# EAGLE board Qwiic Pressure Sensor - LPS25HB-Panel (EAGLE 9.0.1), part 1 of 2
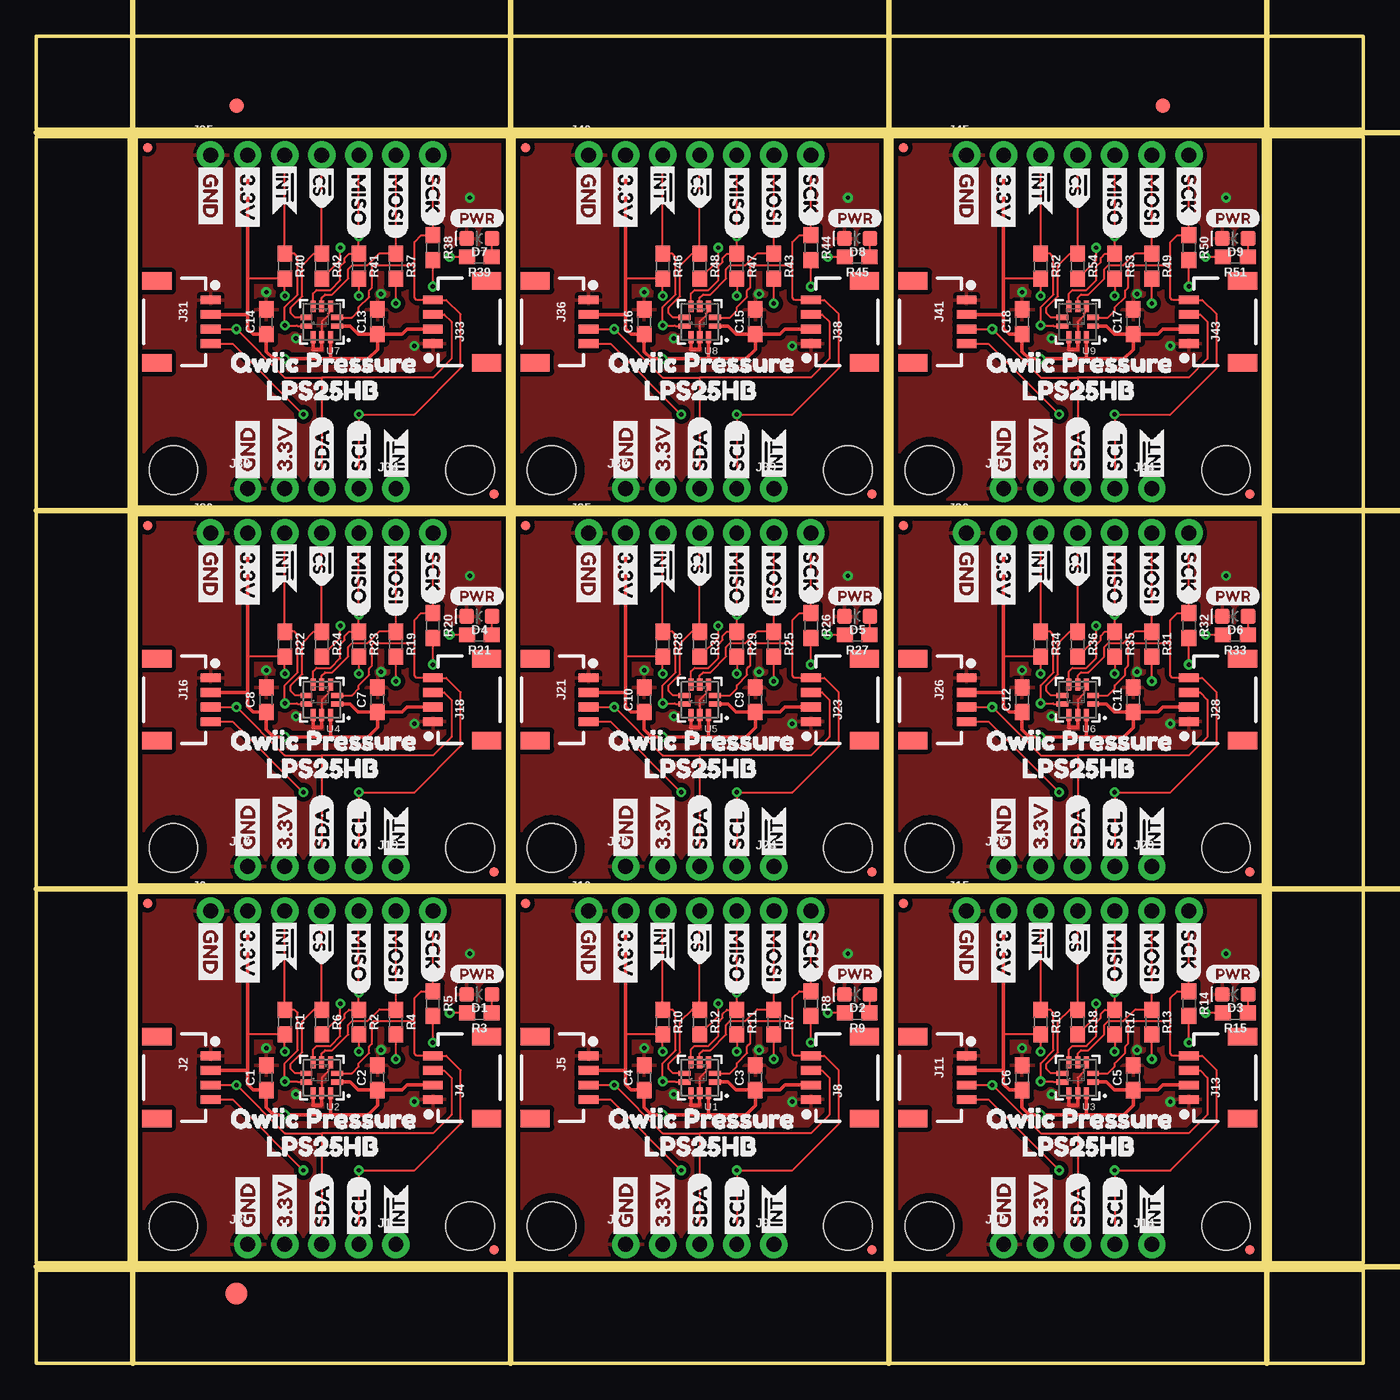
[diagram p0: board, top side]
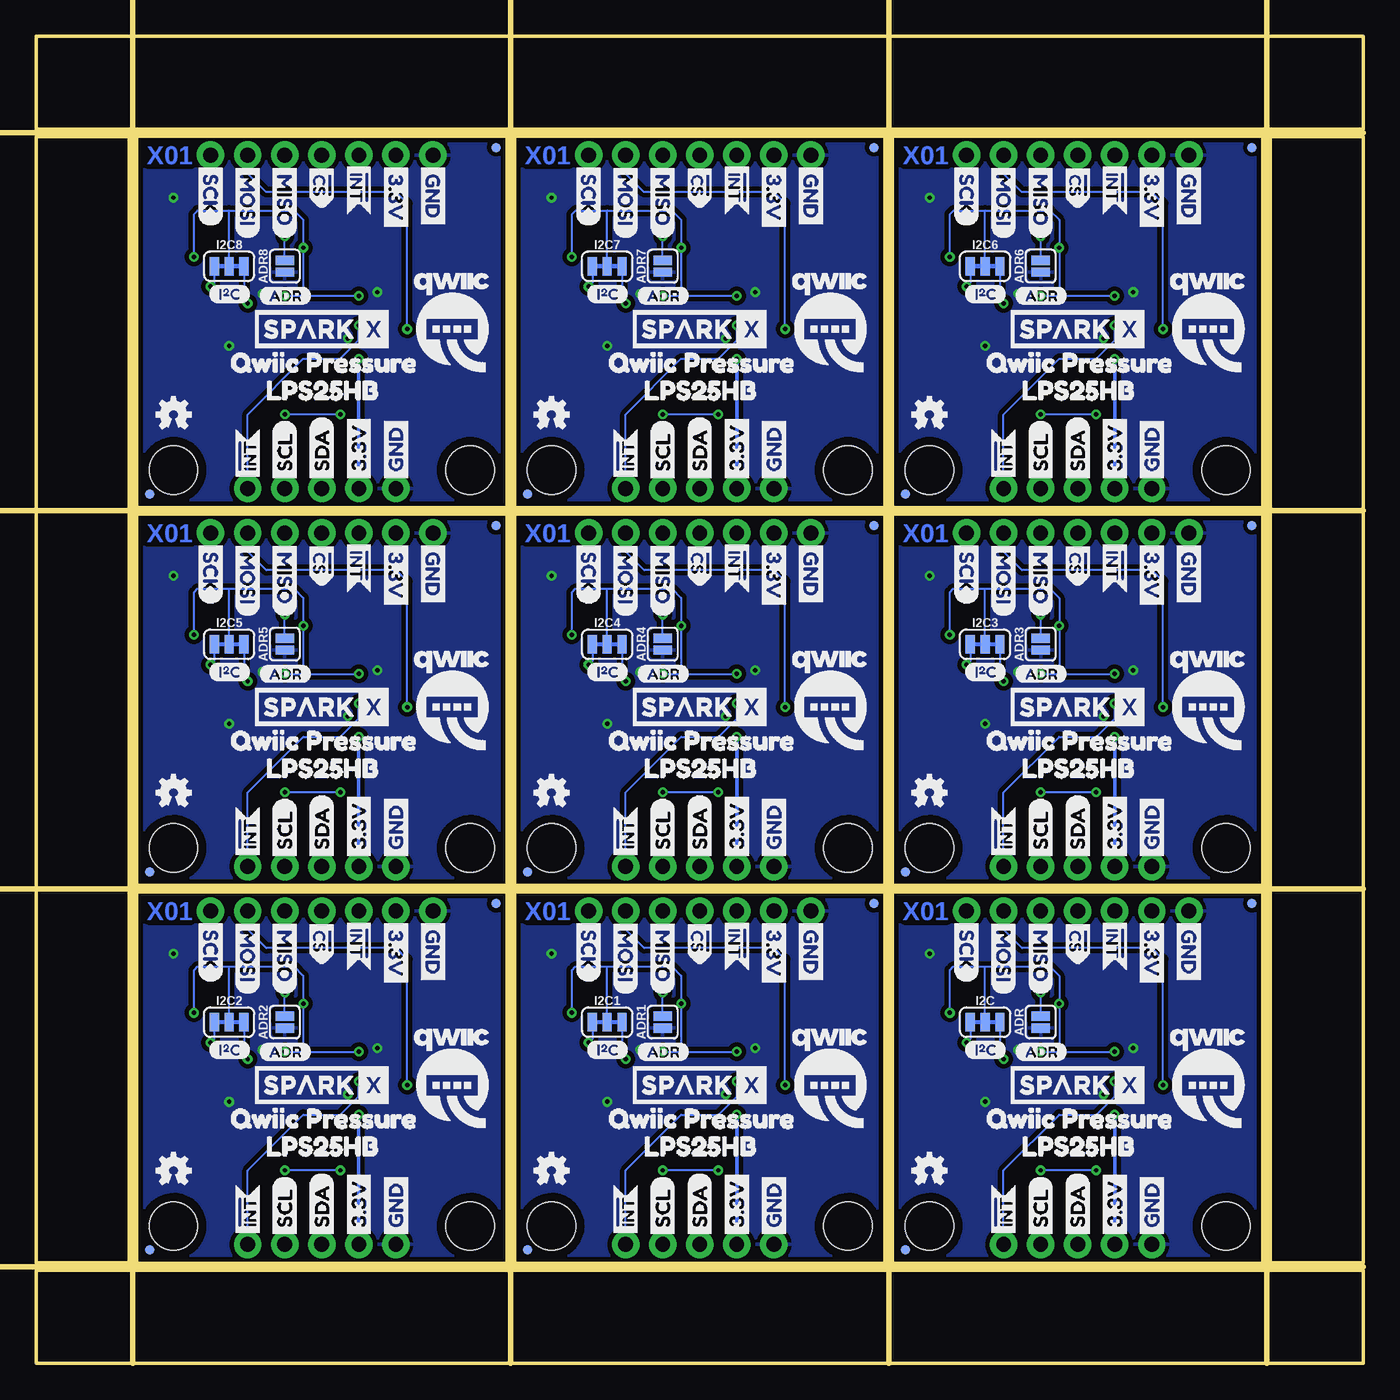
[diagram p1: board, bottom side, seen from below]

Size 90.93 x 90.93 mm. Coordinates in mm from the lower left corner, seen from the top.
Outline: 6.86,6.86 6.86,32.26 32.26,32.26 32.26,6.86 6.86,6.86
Outline: 32.77,6.86 32.77,32.26 58.17,32.26 58.17,6.86 32.77,6.86
Outline: 58.67,6.86 58.67,32.26 84.07,32.26 84.07,6.86 58.67,6.86
Outline: 6.86,32.77 6.86,58.17 32.26,58.17 32.26,32.77 6.86,32.77
Outline: 32.77,32.77 32.77,58.17 58.17,58.17 58.17,32.77 32.77,32.77
Outline: 58.67,32.77 58.67,58.17 84.07,58.17 84.07,32.77 58.67,32.77
Outline: 6.86,58.67 6.86,84.07 32.26,84.07 32.26,58.67 6.86,58.67
Outline: 32.77,58.67 32.77,84.07 58.17,84.07 58.17,58.67 32.77,58.67
Outline: 58.67,58.67 58.67,84.07 84.07,84.07 84.07,58.67 58.67,58.67
Outline: 0,6.35 90.93,6.35 90.93,0 0,0 0,6.35
Outline: 84.58,84.07 90.93,84.07 90.93,6.86 84.58,6.86 84.58,84.07
Outline: 0,90.93 90.93,90.93 90.93,84.58 0,84.58 0,90.93
Outline: 0,84.07 6.35,84.07 6.35,6.86 0,6.86 0,84.07
Copper layers (1*16): Top 0.035mm / dielectric 1.5mm / Bottom 0.035mm
Design rules "SparkFun-2-layer-PCBWay-LIMIT": minimum track width 6mil, minimum drill 0.3mm, track to track 6mil, track to pad 6mil, pad to pad 6mil, via to via 6mil, smd to smd 6mil, copper to edge 6mil, drill to drill 6mil, minimum pad ring 7mil, minimum via ring 7mil, stop-mask expansion 4mil, vias tented up to drill 25mil, thermal gap 10mil
tRestrict: area 19.2,18.2 to 19.3,18.8; area 18.5,18.2 to 18.7,18.8; area 20.4,20.3 to 20.6,21; area 45.1,18.2 to 45.2,18.8; area 44.4,18.2 to 44.6,18.8; area 46.4,20.3 to 46.5,21; area 71,18.2 to 71.1,18.8; area 70.4,18.2 to 70.5,18.8; area 72.3,20.3 to 72.4,21; area 19.2,44.1 to 19.3,44.7; area 18.5,44.1 to 18.7,44.7; area 20.4,46.2 to 20.6,46.9; area 45.1,44.1 to 45.2,44.7; area 44.4,44.1 to 44.6,44.7; area 46.4,46.2 to 46.5,46.9; area 71,44.1 to 71.1,44.7; area 70.4,44.1 to 70.5,44.7; area 72.3,46.2 to 72.4,46.9; area 19.2,70 to 19.3,70.6; area 18.5,70 to 18.7,70.6; area 20.4,72.1 to 20.6,72.8; area 45.1,70 to 45.2,70.6; area 44.4,70 to 44.6,70.6; area 46.4,72.1 to 46.5,72.8; area 71,70 to 71.1,70.6; area 70.4,70 to 70.5,70.6; area 72.3,72.1 to 72.4,72.8
Milling: 8 lines

## Footprints (pad centres in the part's own frame; a part is rotated, then mirrored left to right if it is on the bottom)
SMT-JUMPER_2_NO_SILK = smd 0.635 x 1.27: 1 -0.406,0; 2 0.406,0
0603 = smd 1.1 x 1: 1 -0.85,0; 2 0.85,0
LED-0603 = smd 1 x 1: A -0.877,0; C 0.877,0
FIDUCIAL-1X2 = smd 1 x 1: 1 0,0
FIDUCIAL-1.5X3 = smd 1.5 x 1.5: 1 0,0
SMT-JUMPER_3_2-NC_TRACE_SILK = smd 0.635 x 1.27: 1 -1.016,0; 2 0,0; 3 1.016,0
1X01_NO_SILK = drill 1.016 pad 1.88: 1 0,0
1X04_1MM_RA = smd 0.6 x 1.35: 1 -1.5,0; 2 -0.5,0; 3 0.5,0; 4 1.5,0 | smd 1.2 x 2: NC1 2.8,-3.675; NC2 -2.8,-3.675
1X04_NO_SILK = drill 1.016 pad 1.88: 1 0,0; 2 2.54,0; 3 5.08,0; 4 7.62,0
1X07_NO_SILK = drill 1.016 pad 1.88: 1 0,0; 2 2.54,0; 3 5.08,0; 4 7.62,0; 5 10.16,0; 6 12.7,0; 7 15.24,0
MICRO-FIDUCIAL = smd 0.635 x 0.635: 1 0,0
STAND-OFF = hole 3.302: 0,0
LPS25HB = smd 0.8 x 0.35: 1 -1.05,0.3; 2 -1.05,-0.3; 6 1.05,-0.3; 7 1.05,0.3 | smd 0.35 x 0.8: 3 -0.6,-1.05; 4 0,-1.05; 5 0.6,-1.05; 8 0.6,1.05; 9 0,1.05; 10 -0.6,1.05

## Placement (x,y rotation side)
ADR  [SMT-JUMPER_2_NO_SILK]  22.1,23.37 90 bottom
ADR1  [SMT-JUMPER_2_NO_SILK]  48.01,23.37 90 bottom
ADR2  [SMT-JUMPER_2_NO_SILK]  73.91,23.37 90 bottom
ADR3  [SMT-JUMPER_2_NO_SILK]  22.1,49.28 90 bottom
ADR4  [SMT-JUMPER_2_NO_SILK]  48.01,49.28 90 bottom
ADR5  [SMT-JUMPER_2_NO_SILK]  73.91,49.28 90 bottom
ADR6  [SMT-JUMPER_2_NO_SILK]  22.1,75.18 90 bottom
ADR7  [SMT-JUMPER_2_NO_SILK]  48.01,75.18 90 bottom
ADR8  [SMT-JUMPER_2_NO_SILK]  73.91,75.18 90 bottom
C1  4.7uF  [0603]  15.75,19.56 90 top
C2  0.1uF  [0603]  23.37,19.56 90 top
C3  0.1uF  [0603]  49.28,19.56 90 top
C4  4.7uF  [0603]  41.66,19.56 90 top
C5  0.1uF  [0603]  75.18,19.56 90 top
C6  4.7uF  [0603]  67.56,19.56 90 top
C7  0.1uF  [0603]  23.37,45.47 90 top
C8  4.7uF  [0603]  15.75,45.47 90 top
C9  0.1uF  [0603]  49.28,45.47 90 top
C10  4.7uF  [0603]  41.66,45.47 90 top
C11  0.1uF  [0603]  75.18,45.47 90 top
C12  4.7uF  [0603]  67.56,45.47 90 top
C13  0.1uF  [0603]  23.37,71.37 90 top
C14  4.7uF  [0603]  15.75,71.37 90 top
C15  0.1uF  [0603]  49.28,71.37 90 top
C16  4.7uF  [0603]  41.66,71.37 90 top
C17  0.1uF  [0603]  75.18,71.37 90 top
C18  4.7uF  [0603]  67.56,71.37 90 top
D1  RED  [LED-0603]  30.35,25.27 180 top
D2  RED  [LED-0603]  56.26,25.27 180 top
D3  RED  [LED-0603]  82.17,25.27 180 top
D4  RED  [LED-0603]  30.35,51.18 180 top
D5  RED  [LED-0603]  56.26,51.18 180 top
D6  RED  [LED-0603]  82.17,51.18 180 top
D7  RED  [LED-0603]  30.35,77.09 180 top
D8  RED  [LED-0603]  56.26,77.09 180 top
D9  RED  [LED-0603]  82.17,77.09 180 top
E$1  [FIDUCIAL-1X2]  13.72,86.17 0 top
E$2  [FIDUCIAL-1X2]  77.22,86.17 0 top
E$3  [FIDUCIAL-1.5X3]  13.72,4.76 0 top
I2C  [SMT-JUMPER_3_2-NC_TRACE_SILK]  25.91,23.37 0 bottom
I2C1  [SMT-JUMPER_3_2-NC_TRACE_SILK]  51.82,23.37 0 bottom
I2C2  [SMT-JUMPER_3_2-NC_TRACE_SILK]  77.72,23.37 0 bottom
I2C3  [SMT-JUMPER_3_2-NC_TRACE_SILK]  25.91,49.28 0 bottom
I2C4  [SMT-JUMPER_3_2-NC_TRACE_SILK]  51.82,49.28 0 bottom
I2C5  [SMT-JUMPER_3_2-NC_TRACE_SILK]  77.72,49.28 0 bottom
I2C6  [SMT-JUMPER_3_2-NC_TRACE_SILK]  25.91,75.18 0 bottom
I2C7  [SMT-JUMPER_3_2-NC_TRACE_SILK]  51.82,75.18 0 bottom
I2C8  [SMT-JUMPER_3_2-NC_TRACE_SILK]  77.72,75.18 0 bottom
J1  [1X01_NO_SILK]  24.64,8.13 0 top
J2  [1X04_1MM_RA]  11.94,19.56 270 top
J3  PTH  [1X04_NO_SILK]  14.48,8.13 0 top
J4  [1X04_1MM_RA]  27.18,19.56 90 top
J5  [1X04_1MM_RA]  37.85,19.56 270 top
J6  [1X07_NO_SILK]  11.94,30.99 0 top
J7  PTH  [1X04_NO_SILK]  40.39,8.13 0 top
J8  [1X04_1MM_RA]  53.09,19.56 90 top
J9  [1X01_NO_SILK]  50.55,8.13 0 top
J10  [1X07_NO_SILK]  37.85,30.99 0 top
J11  [1X04_1MM_RA]  63.75,19.56 270 top
J12  PTH  [1X04_NO_SILK]  66.29,8.13 0 top
J13  [1X04_1MM_RA]  78.99,19.56 90 top
J14  [1X01_NO_SILK]  76.45,8.13 0 top
J15  [1X07_NO_SILK]  63.75,30.99 0 top
J16  [1X04_1MM_RA]  11.94,45.47 270 top
J17  PTH  [1X04_NO_SILK]  14.48,34.04 0 top
J18  [1X04_1MM_RA]  27.18,45.47 90 top
J19  [1X01_NO_SILK]  24.64,34.04 0 top
J20  [1X07_NO_SILK]  11.94,56.9 0 top
J21  [1X04_1MM_RA]  37.85,45.47 270 top
J22  PTH  [1X04_NO_SILK]  40.39,34.04 0 top
J23  [1X04_1MM_RA]  53.09,45.47 90 top
J24  [1X01_NO_SILK]  50.55,34.04 0 top
J25  [1X07_NO_SILK]  37.85,56.9 0 top
J26  [1X04_1MM_RA]  63.75,45.47 270 top
J27  PTH  [1X04_NO_SILK]  66.29,34.04 0 top
J28  [1X04_1MM_RA]  78.99,45.47 90 top
J29  [1X01_NO_SILK]  76.45,34.04 0 top
J30  [1X07_NO_SILK]  63.75,56.9 0 top
J31  [1X04_1MM_RA]  11.94,71.37 270 top
J32  PTH  [1X04_NO_SILK]  14.48,59.94 0 top
J33  [1X04_1MM_RA]  27.18,71.37 90 top
J34  [1X01_NO_SILK]  24.64,59.94 0 top
J35  [1X07_NO_SILK]  11.94,82.8 0 top
J36  [1X04_1MM_RA]  37.85,71.37 270 top
J37  PTH  [1X04_NO_SILK]  40.39,59.94 0 top
J38  [1X04_1MM_RA]  53.09,71.37 90 top
J39  [1X01_NO_SILK]  50.55,59.94 0 top
J40  [1X07_NO_SILK]  37.85,82.8 0 top
J41  [1X04_1MM_RA]  63.75,71.37 270 top
J42  PTH  [1X04_NO_SILK]  66.29,59.94 0 top
J43  [1X04_1MM_RA]  78.99,71.37 90 top
J44  [1X01_NO_SILK]  76.45,59.94 0 top
J45  [1X07_NO_SILK]  63.75,82.8 0 top
JP1  FIDUCIALUFIDUCIAL  [MICRO-FIDUCIAL]  7.62,31.5 0 bottom
JP2  FIDUCIALUFIDUCIAL  [MICRO-FIDUCIAL]  31.37,7.75 0 top
JP3  STAND-OFF  [STAND-OFF]  9.4,9.4 0 top
JP4  STAND-OFF  [STAND-OFF]  29.72,9.4 0 top
JP5  FIDUCIALUFIDUCIAL  [MICRO-FIDUCIAL]  31.37,7.75 0 bottom
JP6  FIDUCIALUFIDUCIAL  [MICRO-FIDUCIAL]  7.62,31.5 0 top
JP7  STAND-OFF  [STAND-OFF]  35.31,9.4 0 top
JP8  STAND-OFF  [STAND-OFF]  55.63,9.4 0 top
JP9  FIDUCIALUFIDUCIAL  [MICRO-FIDUCIAL]  57.28,7.75 0 top
JP10  FIDUCIALUFIDUCIAL  [MICRO-FIDUCIAL]  33.53,31.5 0 top
JP11  FIDUCIALUFIDUCIAL  [MICRO-FIDUCIAL]  33.53,31.5 0 bottom
JP12  FIDUCIALUFIDUCIAL  [MICRO-FIDUCIAL]  57.28,7.75 0 bottom
JP13  STAND-OFF  [STAND-OFF]  61.21,9.4 0 top
JP14  STAND-OFF  [STAND-OFF]  81.53,9.4 0 top
JP15  FIDUCIALUFIDUCIAL  [MICRO-FIDUCIAL]  83.19,7.75 0 top
JP16  FIDUCIALUFIDUCIAL  [MICRO-FIDUCIAL]  59.44,31.5 0 top
JP17  FIDUCIALUFIDUCIAL  [MICRO-FIDUCIAL]  59.44,31.5 0 bottom
JP18  FIDUCIALUFIDUCIAL  [MICRO-FIDUCIAL]  83.19,7.75 0 bottom
JP19  STAND-OFF  [STAND-OFF]  9.4,35.31 0 top
JP20  STAND-OFF  [STAND-OFF]  29.72,35.31 0 top
JP21  FIDUCIALUFIDUCIAL  [MICRO-FIDUCIAL]  31.37,33.66 0 top
JP22  FIDUCIALUFIDUCIAL  [MICRO-FIDUCIAL]  7.62,57.4 0 top
JP23  FIDUCIALUFIDUCIAL  [MICRO-FIDUCIAL]  7.62,57.4 0 bottom
JP24  FIDUCIALUFIDUCIAL  [MICRO-FIDUCIAL]  31.37,33.66 0 bottom
JP25  STAND-OFF  [STAND-OFF]  35.31,35.31 0 top
JP26  STAND-OFF  [STAND-OFF]  55.63,35.31 0 top
JP27  FIDUCIALUFIDUCIAL  [MICRO-FIDUCIAL]  57.28,33.66 0 top
JP28  FIDUCIALUFIDUCIAL  [MICRO-FIDUCIAL]  33.53,57.4 0 top
JP29  FIDUCIALUFIDUCIAL  [MICRO-FIDUCIAL]  33.53,57.4 0 bottom
JP30  FIDUCIALUFIDUCIAL  [MICRO-FIDUCIAL]  57.28,33.66 0 bottom
JP31  STAND-OFF  [STAND-OFF]  61.21,35.31 0 top
JP32  STAND-OFF  [STAND-OFF]  81.53,35.31 0 top
JP33  FIDUCIALUFIDUCIAL  [MICRO-FIDUCIAL]  83.19,33.66 0 top
JP34  FIDUCIALUFIDUCIAL  [MICRO-FIDUCIAL]  59.44,57.4 0 top
JP35  FIDUCIALUFIDUCIAL  [MICRO-FIDUCIAL]  59.44,57.4 0 bottom
JP36  FIDUCIALUFIDUCIAL  [MICRO-FIDUCIAL]  83.19,33.66 0 bottom
JP37  STAND-OFF  [STAND-OFF]  9.4,61.21 0 top
JP38  STAND-OFF  [STAND-OFF]  29.72,61.21 0 top
JP39  FIDUCIALUFIDUCIAL  [MICRO-FIDUCIAL]  31.37,59.56 0 top
JP40  FIDUCIALUFIDUCIAL  [MICRO-FIDUCIAL]  7.62,83.31 0 top
JP41  FIDUCIALUFIDUCIAL  [MICRO-FIDUCIAL]  7.62,83.31 0 bottom
JP42  FIDUCIALUFIDUCIAL  [MICRO-FIDUCIAL]  31.37,59.56 0 bottom
JP43  STAND-OFF  [STAND-OFF]  35.31,61.21 0 top
JP44  STAND-OFF  [STAND-OFF]  55.63,61.21 0 top
JP45  FIDUCIALUFIDUCIAL  [MICRO-FIDUCIAL]  57.28,59.56 0 top
JP46  FIDUCIALUFIDUCIAL  [MICRO-FIDUCIAL]  33.53,83.31 0 top
JP47  FIDUCIALUFIDUCIAL  [MICRO-FIDUCIAL]  33.53,83.31 0 bottom
JP48  FIDUCIALUFIDUCIAL  [MICRO-FIDUCIAL]  57.28,59.56 0 bottom
JP49  STAND-OFF  [STAND-OFF]  61.21,61.21 0 top
JP50  STAND-OFF  [STAND-OFF]  81.53,61.21 0 top
JP51  FIDUCIALUFIDUCIAL  [MICRO-FIDUCIAL]  83.19,59.56 0 top
JP52  FIDUCIALUFIDUCIAL  [MICRO-FIDUCIAL]  59.44,83.31 0 top
JP53  FIDUCIALUFIDUCIAL  [MICRO-FIDUCIAL]  59.44,83.31 0 bottom
JP54  FIDUCIALUFIDUCIAL  [MICRO-FIDUCIAL]  83.19,59.56 0 bottom
LOGO1  OSHW-LOGOMINI  [OSHW-LOGO-MINI]  29.72,13.21 0 bottom
LOGO2  OSHW-LOGOMINI  [OSHW-LOGO-MINI]  55.63,13.21 0 bottom
LOGO3  OSHW-LOGOMINI  [OSHW-LOGO-MINI]  81.53,13.21 0 bottom
LOGO4  OSHW-LOGOMINI  [OSHW-LOGO-MINI]  29.72,39.12 0 bottom
LOGO5  OSHW-LOGOMINI  [OSHW-LOGO-MINI]  55.63,39.12 0 bottom
LOGO6  OSHW-LOGOMINI  [OSHW-LOGO-MINI]  81.53,39.12 0 bottom
LOGO7  OSHW-LOGOMINI  [OSHW-LOGO-MINI]  29.72,65.02 0 bottom
LOGO8  OSHW-LOGOMINI  [OSHW-LOGO-MINI]  55.63,65.02 0 bottom
LOGO9  OSHW-LOGOMINI  [OSHW-LOGO-MINI]  81.53,65.02 0 bottom
R1  10k  [0603]  17.02,23.37 270 top
R2  10k  [0603]  22.1,23.37 270 top
R3  1k  [0603]  30.35,24 180 top
R4  2.2k  [0603]  24.64,23.37 270 top
R5  2.2k  [0603]  27.18,24.64 270 top
R6  10k  [0603]  19.56,23.37 270 top
R7  2.2k  [0603]  50.55,23.37 270 top
R8  2.2k  [0603]  53.09,24.64 270 top
R9  1k  [0603]  56.26,24 180 top
R10  10k  [0603]  42.93,23.37 270 top
R11  10k  [0603]  48.01,23.37 270 top
R12  10k  [0603]  45.47,23.37 270 top
R13  2.2k  [0603]  76.45,23.37 270 top
R14  2.2k  [0603]  78.99,24.64 270 top
R15  1k  [0603]  82.17,24 180 top
R16  10k  [0603]  68.83,23.37 270 top
R17  10k  [0603]  73.91,23.37 270 top
R18  10k  [0603]  71.37,23.37 270 top
R19  2.2k  [0603]  24.64,49.28 270 top
R20  2.2k  [0603]  27.18,50.55 270 top
R21  1k  [0603]  30.35,49.91 180 top
R22  10k  [0603]  17.02,49.28 270 top
R23  10k  [0603]  22.1,49.28 270 top
R24  10k  [0603]  19.56,49.28 270 top
R25  2.2k  [0603]  50.55,49.28 270 top
R26  2.2k  [0603]  53.09,50.55 270 top
R27  1k  [0603]  56.26,49.91 180 top
R28  10k  [0603]  42.93,49.28 270 top
R29  10k  [0603]  48.01,49.28 270 top
R30  10k  [0603]  45.47,49.28 270 top
R31  2.2k  [0603]  76.45,49.28 270 top
R32  2.2k  [0603]  78.99,50.55 270 top
R33  1k  [0603]  82.17,49.91 180 top
R34  10k  [0603]  68.83,49.28 270 top
R35  10k  [0603]  73.91,49.28 270 top
R36  10k  [0603]  71.37,49.28 270 top
R37  2.2k  [0603]  24.64,75.18 270 top
R38  2.2k  [0603]  27.18,76.45 270 top
R39  1k  [0603]  30.35,75.82 180 top
R40  10k  [0603]  17.02,75.18 270 top
R41  10k  [0603]  22.1,75.18 270 top
R42  10k  [0603]  19.56,75.18 270 top
R43  2.2k  [0603]  50.55,75.18 270 top
R44  2.2k  [0603]  53.09,76.45 270 top
R45  1k  [0603]  56.26,75.82 180 top
R46  10k  [0603]  42.93,75.18 270 top
R47  10k  [0603]  48.01,75.18 270 top
R48  10k  [0603]  45.47,75.18 270 top
R49  2.2k  [0603]  76.45,75.18 270 top
R50  2.2k  [0603]  78.99,76.45 270 top
R51  1k  [0603]  82.17,75.82 180 top
R52  10k  [0603]  68.83,75.18 270 top
R53  10k  [0603]  73.91,75.18 270 top
R54  10k  [0603]  71.37,75.18 270 top
U1  LPS25HB  [LPS25HB]  45.47,19.56 180 top
U2  LPS25HB  [LPS25HB]  19.56,19.56 180 top
U3  LPS25HB  [LPS25HB]  71.37,19.56 180 top
U4  LPS25HB  [LPS25HB]  19.56,45.47 180 top
U5  LPS25HB  [LPS25HB]  45.47,45.47 180 top
U6  LPS25HB  [LPS25HB]  71.37,45.47 180 top
U7  LPS25HB  [LPS25HB]  19.56,71.37 180 top
U8  LPS25HB  [LPS25HB]  45.47,71.37 180 top
U9  LPS25HB  [LPS25HB]  71.37,71.37 180 top
U$1  [QWIIC_PRESSURE1]  26.92,16.76 0 bottom
U$2  SPARKX-LOGO4  [SPARKX-MEDIUM]  19.56,19.05 0 bottom
U$3  [GND1]  14.48,8.38 90 bottom
U$4  [3#3V2]  17.02,8.38 90 bottom
U$5  [SDA8]  19.56,8.38 90 bottom
U$6  [SCL9]  22.1,8.38 90 bottom
U$7  [LPS25HB0]  24.51,14.86 0 bottom
U$8  SPARKX-LOGO4  [SPARKX-MEDIUM]  45.47,19.05 0 bottom
U$9  [QWIIC-LOGO-MEDIUM]  10.67,19.56 0 bottom
U$10  [MISO]  22.1,30.61 270 top
U$11  [MISO]  22.1,30.61 270 bottom
U$12  [I_SUPER2_C-()-03]  27.3,21.46 0 bottom
U$13  [3#3V2]  42.93,8.38 90 top
U$14  [GND1]  40.39,8.38 90 top
U$15  [PWR-()-03]  28.32,26.67 0 top
U$16  [MOSI]  24.64,30.61 270 bottom
U$17  [MOSI]  24.64,30.61 270 top
U$18  [SCK-[)]  27.18,30.61 270 top
U$19  [SCK-[)]  27.18,30.61 270 bottom
U$20  [CS#-[>]  19.56,30.73 270 top
U$21  [3#3V2]  17.02,8.38 90 top
U$22  [GND1]  14.48,8.38 90 top
U$23  [CS#-[>]  19.56,30.73 270 bottom
U$24  [INT#-[<]  17.02,30.86 270 top
U$25  [INT#-[<]  17.02,30.86 270 bottom
U$26  [SCL9]  22.1,8.38 90 top
U$27  [SDA8]  19.56,8.38 90 top
U$28  [INT#-[<]  24.64,8.25 90 top
U$29  [INT#-[<]  24.64,8.25 90 bottom
U$30  [3#3V2]  14.48,30.61 270 top
U$31  [GND1]  11.94,30.61 270 top
U$32  [GND1]  11.94,30.61 270 bottom
U$33  [3#3V2]  14.48,30.61 270 bottom
U$34  [ADR-()-03]  23.88,21.34 0 bottom
U$35  [LPS25HB0]  14.61,14.86 0 top
U$36  [SCL9]  48.01,8.38 90 top
U$37  [QWIIC_PRESSURE1]  12.19,16.76 0 top
U$38  [SDA8]  45.47,8.38 90 top
U$39  [GND1]  40.39,8.38 90 bottom
U$40  [3#3V2]  42.93,8.38 90 bottom
U$41  [SDA8]  45.47,8.38 90 bottom
U$42  [SCL9]  48.01,8.38 90 bottom
U$43  [QWIIC-LOGO-MEDIUM]  36.58,19.56 0 bottom
U$44  [I_SUPER2_C-()-03]  53.21,21.46 0 bottom
U$45  [PWR-()-03]  54.23,26.67 0 top
U$46  [MISO]  48.01,30.61 270 top
U$47  [MISO]  48.01,30.61 270 bottom
U$48  [MOSI]  50.55,30.61 270 bottom
U$49  [MOSI]  50.55,30.61 270 top
U$50  [SCK-[)]  53.09,30.61 270 top
U$51  [SCK-[)]  53.09,30.61 270 bottom
U$52  [CS#-[>]  45.47,30.73 270 top
U$53  [CS#-[>]  45.47,30.73 270 bottom
U$54  [INT#-[<]  42.93,30.86 270 top
U$55  [INT#-[<]  42.93,30.86 270 bottom
U$56  [INT#-[<]  50.55,8.25 90 top
U$57  [INT#-[<]  50.55,8.25 90 bottom
U$58  [3#3V2]  40.39,30.61 270 top
U$59  [GND1]  37.85,30.61 270 top
U$60  [GND1]  37.85,30.61 270 bottom
U$61  [3#3V2]  40.39,30.61 270 bottom
U$62  [ADR-()-03]  49.78,21.34 0 bottom
U$63  [LPS25HB0]  40.51,14.86 0 top
U$64  [QWIIC_PRESSURE1]  38.1,16.76 0 top
U$65  [QWIIC_PRESSURE1]  52.83,16.76 0 bottom
U$66  [LPS25HB0]  50.42,14.86 0 bottom
U$67  SPARKX-LOGO4  [SPARKX-MEDIUM]  71.37,19.05 0 bottom
U$68  [3#3V2]  68.83,8.38 90 top
U$69  [GND1]  66.29,8.38 90 top
U$70  [SCL9]  73.91,8.38 90 top
U$71  [SDA8]  71.37,8.38 90 top
U$72  [GND1]  66.29,8.38 90 bottom
U$73  [3#3V2]  68.83,8.38 90 bottom
U$74  [SDA8]  71.37,8.38 90 bottom
U$75  [SCL9]  73.91,8.38 90 bottom
U$76  [QWIIC-LOGO-MEDIUM]  62.48,19.56 0 bottom
U$77  [I_SUPER2_C-()-03]  79.12,21.46 0 bottom
U$78  [PWR-()-03]  80.14,26.67 0 top
U$79  [MISO]  73.91,30.61 270 top
U$80  [MISO]  73.91,30.61 270 bottom
U$81  [MOSI]  76.45,30.61 270 bottom
U$82  [MOSI]  76.45,30.61 270 top
U$83  [SCK-[)]  78.99,30.61 270 top
U$84  [SCK-[)]  78.99,30.61 270 bottom
U$85  [CS#-[>]  71.37,30.73 270 top
U$86  [CS#-[>]  71.37,30.73 270 bottom
U$87  [INT#-[<]  68.83,30.86 270 top
U$88  [INT#-[<]  68.83,30.86 270 bottom
U$89  [INT#-[<]  76.45,8.25 90 top
U$90  [INT#-[<]  76.45,8.25 90 bottom
U$91  [3#3V2]  66.29,30.61 270 top
U$92  [GND1]  63.75,30.61 270 top
U$93  [GND1]  63.75,30.61 270 bottom
U$94  [3#3V2]  66.29,30.61 270 bottom
U$95  [ADR-()-03]  75.69,21.34 0 bottom
U$96  [LPS25HB0]  66.42,14.86 0 top
U$97  [QWIIC_PRESSURE1]  64.01,16.76 0 top
U$98  [QWIIC_PRESSURE1]  78.74,16.76 0 bottom
U$99  [LPS25HB0]  76.33,14.86 0 bottom
U$100  SPARKX-LOGO4  [SPARKX-MEDIUM]  19.56,44.96 0 bottom
U$101  [3#3V2]  17.02,34.29 90 top
U$102  [GND1]  14.48,34.29 90 top
U$103  [SCL9]  22.1,34.29 90 top
U$104  [SDA8]  19.56,34.29 90 top
U$105  [GND1]  14.48,34.29 90 bottom
U$106  [3#3V2]  17.02,34.29 90 bottom
U$107  [SDA8]  19.56,34.29 90 bottom
U$108  [SCL9]  22.1,34.29 90 bottom
U$109  [QWIIC-LOGO-MEDIUM]  10.67,45.47 0 bottom
U$110  [I_SUPER2_C-()-03]  27.3,47.37 0 bottom
U$111  [PWR-()-03]  28.32,52.58 0 top
U$112  [MISO]  22.1,56.51 270 top
U$113  [MISO]  22.1,56.51 270 bottom
U$114  [MOSI]  24.64,56.51 270 bottom
U$115  [MOSI]  24.64,56.51 270 top
U$116  [SCK-[)]  27.18,56.51 270 top
U$117  [SCK-[)]  27.18,56.51 270 bottom
U$118  [CS#-[>]  19.56,56.64 270 top
U$119  [CS#-[>]  19.56,56.64 270 bottom
U$120  [INT#-[<]  17.02,56.77 270 top
U$121  [INT#-[<]  17.02,56.77 270 bottom
U$122  [INT#-[<]  24.64,34.16 90 top
U$123  [INT#-[<]  24.64,34.16 90 bottom
U$124  [3#3V2]  14.48,56.51 270 top
U$125  [GND1]  11.94,56.51 270 top
U$126  [GND1]  11.94,56.51 270 bottom
U$127  [3#3V2]  14.48,56.51 270 bottom
U$128  [ADR-()-03]  23.88,47.24 0 bottom
U$129  [LPS25HB0]  14.61,40.77 0 top
U$130  [QWIIC_PRESSURE1]  12.19,42.67 0 top
U$131  [QWIIC_PRESSURE1]  26.92,42.67 0 bottom
U$132  [LPS25HB0]  24.51,40.77 0 bottom
U$133  SPARKX-LOGO4  [SPARKX-MEDIUM]  45.47,44.96 0 bottom
U$134  [3#3V2]  42.93,34.29 90 top
U$135  [GND1]  40.39,34.29 90 top
U$136  [SCL9]  48.01,34.29 90 top
U$137  [SDA8]  45.47,34.29 90 top
U$138  [GND1]  40.39,34.29 90 bottom
U$139  [3#3V2]  42.93,34.29 90 bottom
U$140  [SDA8]  45.47,34.29 90 bottom
U$141  [SCL9]  48.01,34.29 90 bottom
U$142  [QWIIC-LOGO-MEDIUM]  36.58,45.47 0 bottom
U$143  [I_SUPER2_C-()-03]  53.21,47.37 0 bottom
U$144  [PWR-()-03]  54.23,52.58 0 top
U$145  [MISO]  48.01,56.51 270 top
U$146  [MISO]  48.01,56.51 270 bottom
U$147  [MOSI]  50.55,56.51 270 bottom
U$148  [MOSI]  50.55,56.51 270 top
U$149  [SCK-[)]  53.09,56.51 270 top
U$150  [SCK-[)]  53.09,56.51 270 bottom
U$151  [CS#-[>]  45.47,56.64 270 top
U$152  [CS#-[>]  45.47,56.64 270 bottom
U$153  [INT#-[<]  42.93,56.77 270 top
U$154  [INT#-[<]  42.93,56.77 270 bottom
U$155  [INT#-[<]  50.55,34.16 90 top
U$156  [INT#-[<]  50.55,34.16 90 bottom
U$157  [3#3V2]  40.39,56.51 270 top
U$158  [GND1]  37.85,56.51 270 top
U$159  [GND1]  37.85,56.51 270 bottom
U$160  [3#3V2]  40.39,56.51 270 bottom
U$161  [ADR-()-03]  49.78,47.24 0 bottom
U$162  [LPS25HB0]  40.51,40.77 0 top
U$163  [QWIIC_PRESSURE1]  38.1,42.67 0 top
U$164  [QWIIC_PRESSURE1]  52.83,42.67 0 bottom
U$165  [LPS25HB0]  50.42,40.77 0 bottom
U$166  SPARKX-LOGO4  [SPARKX-MEDIUM]  71.37,44.96 0 bottom
U$167  [3#3V2]  68.83,34.29 90 top
U$168  [GND1]  66.29,34.29 90 top
U$169  [SCL9]  73.91,34.29 90 top
U$170  [SDA8]  71.37,34.29 90 top
U$171  [GND1]  66.29,34.29 90 bottom
U$172  [3#3V2]  68.83,34.29 90 bottom
U$173  [SDA8]  71.37,34.29 90 bottom
U$174  [SCL9]  73.91,34.29 90 bottom
U$175  [QWIIC-LOGO-MEDIUM]  62.48,45.47 0 bottom
U$176  [I_SUPER2_C-()-03]  79.12,47.37 0 bottom
U$177  [PWR-()-03]  80.14,52.58 0 top
U$178  [MISO]  73.91,56.51 270 top
U$179  [MISO]  73.91,56.51 270 bottom
U$180  [MOSI]  76.45,56.51 270 bottom
U$181  [MOSI]  76.45,56.51 270 top
U$182  [SCK-[)]  78.99,56.51 270 top
U$183  [SCK-[)]  78.99,56.51 270 bottom
U$184  [CS#-[>]  71.37,56.64 270 top
U$185  [CS#-[>]  71.37,56.64 270 bottom
U$186  [INT#-[<]  68.83,56.77 270 top
U$187  [INT#-[<]  68.83,56.77 270 bottom
U$188  [INT#-[<]  76.45,34.16 90 top
U$189  [INT#-[<]  76.45,34.16 90 bottom
U$190  [3#3V2]  66.29,56.51 270 top
U$191  [GND1]  63.75,56.51 270 top
U$192  [GND1]  63.75,56.51 270 bottom
U$193  [3#3V2]  66.29,56.51 270 bottom
U$194  [ADR-()-03]  75.69,47.24 0 bottom
U$195  [LPS25HB0]  66.42,40.77 0 top
U$196  [QWIIC_PRESSURE1]  64.01,42.67 0 top
U$197  [QWIIC_PRESSURE1]  78.74,42.67 0 bottom
U$198  [LPS25HB0]  76.33,40.77 0 bottom
U$199  SPARKX-LOGO4  [SPARKX-MEDIUM]  19.56,70.87 0 bottom
U$200  [3#3V2]  17.02,60.2 90 top
U$201  [GND1]  14.48,60.2 90 top
U$202  [SCL9]  22.1,60.2 90 top
U$203  [SDA8]  19.56,60.2 90 top
U$204  [GND1]  14.48,60.2 90 bottom
U$205  [3#3V2]  17.02,60.2 90 bottom
U$206  [SDA8]  19.56,60.2 90 bottom
U$207  [SCL9]  22.1,60.2 90 bottom
U$208  [QWIIC-LOGO-MEDIUM]  10.67,71.37 0 bottom
U$209  [I_SUPER2_C-()-03]  27.3,73.28 0 bottom
U$210  [PWR-()-03]  28.32,78.49 0 top
U$211  [MISO]  22.1,82.42 270 top
U$212  [MISO]  22.1,82.42 270 bottom
U$213  [MOSI]  24.64,82.42 270 bottom
U$214  [MOSI]  24.64,82.42 270 top
U$215  [SCK-[)]  27.18,82.42 270 top
U$216  [SCK-[)]  27.18,82.42 270 bottom
U$217  [CS#-[>]  19.56,82.55 270 top
U$218  [CS#-[>]  19.56,82.55 270 bottom
U$219  [INT#-[<]  17.02,82.68 270 top
U$220  [INT#-[<]  17.02,82.68 270 bottom
U$221  [INT#-[<]  24.64,60.07 90 top
U$222  [INT#-[<]  24.64,60.07 90 bottom
U$223  [3#3V2]  14.48,82.42 270 top
U$224  [GND1]  11.94,82.42 270 top
U$225  [GND1]  11.94,82.42 270 bottom
U$226  [3#3V2]  14.48,82.42 270 bottom
U$227  [ADR-()-03]  23.88,73.15 0 bottom
U$228  [LPS25HB0]  14.61,66.67 0 top
U$229  [QWIIC_PRESSURE1]  12.19,68.58 0 top
U$230  [QWIIC_PRESSURE1]  26.92,68.58 0 bottom
U$231  [LPS25HB0]  24.51,66.67 0 bottom
U$232  SPARKX-LOGO4  [SPARKX-MEDIUM]  45.47,70.87 0 bottom
U$233  [3#3V2]  42.93,60.2 90 top
U$234  [GND1]  40.39,60.2 90 top
U$235  [SCL9]  48.01,60.2 90 top
U$236  [SDA8]  45.47,60.2 90 top
U$237  [GND1]  40.39,60.2 90 bottom
U$238  [3#3V2]  42.93,60.2 90 bottom
U$239  [SDA8]  45.47,60.2 90 bottom
U$240  [SCL9]  48.01,60.2 90 bottom
U$241  [QWIIC-LOGO-MEDIUM]  36.58,71.37 0 bottom
U$242  [I_SUPER2_C-()-03]  53.21,73.28 0 bottom
U$243  [PWR-()-03]  54.23,78.49 0 top
U$244  [MISO]  48.01,82.42 270 top
U$245  [MISO]  48.01,82.42 270 bottom
U$246  [MOSI]  50.55,82.42 270 bottom
U$247  [MOSI]  50.55,82.42 270 top
U$248  [SCK-[)]  53.09,82.42 270 top
U$249  [SCK-[)]  53.09,82.42 270 bottom
U$250  [CS#-[>]  45.47,82.55 270 top
U$251  [CS#-[>]  45.47,82.55 270 bottom
U$252  [INT#-[<]  42.93,82.68 270 top
U$253  [INT#-[<]  42.93,82.68 270 bottom
U$254  [INT#-[<]  50.55,60.07 90 top
U$255  [INT#-[<]  50.55,60.07 90 bottom
U$256  [3#3V2]  40.39,82.42 270 top
U$257  [GND1]  37.85,82.42 270 top
U$258  [GND1]  37.85,82.42 270 bottom
U$259  [3#3V2]  40.39,82.42 270 bottom
U$260  [ADR-()-03]  49.78,73.15 0 bottom
U$261  [LPS25HB0]  40.51,66.67 0 top
U$262  [QWIIC_PRESSURE1]  38.1,68.58 0 top
U$263  [QWIIC_PRESSURE1]  52.83,68.58 0 bottom
U$264  [LPS25HB0]  50.42,66.67 0 bottom
U$265  SPARKX-LOGO4  [SPARKX-MEDIUM]  71.37,70.87 0 bottom
U$266  [3#3V2]  68.83,60.2 90 top
U$267  [GND1]  66.29,60.2 90 top
U$268  [SCL9]  73.91,60.2 90 top
U$269  [SDA8]  71.37,60.2 90 top
U$270  [GND1]  66.29,60.2 90 bottom
U$271  [3#3V2]  68.83,60.2 90 bottom
U$272  [SDA8]  71.37,60.2 90 bottom
U$273  [SCL9]  73.91,60.2 90 bottom
U$274  [QWIIC-LOGO-MEDIUM]  62.48,71.37 0 bottom
U$275  [I_SUPER2_C-()-03]  79.12,73.28 0 bottom
U$276  [PWR-()-03]  80.14,78.49 0 top
U$277  [MISO]  73.91,82.42 270 top
U$278  [MISO]  73.91,82.42 270 bottom
U$279  [MOSI]  76.45,82.42 270 bottom
U$280  [MOSI]  76.45,82.42 270 top
U$281  [SCK-[)]  78.99,82.42 270 top
U$282  [SCK-[)]  78.99,82.42 270 bottom
U$283  [CS#-[>]  71.37,82.55 270 top
U$284  [CS#-[>]  71.37,82.55 270 bottom
U$285  [INT#-[<]  68.83,82.68 270 top
U$286  [INT#-[<]  68.83,82.68 270 bottom
U$287  [INT#-[<]  76.45,60.07 90 top
U$288  [INT#-[<]  76.45,60.07 90 bottom
U$289  [3#3V2]  66.29,82.42 270 top
U$290  [GND1]  63.75,82.42 270 top
U$291  [GND1]  63.75,82.42 270 bottom
U$292  [3#3V2]  66.29,82.42 270 bottom
U$293  [ADR-()-03]  75.69,73.15 0 bottom
U$294  [LPS25HB0]  66.42,66.67 0 top
U$295  [QWIIC_PRESSURE1]  64.01,68.58 0 top
U$296  [QWIIC_PRESSURE1]  78.74,68.58 0 bottom
U$297  [LPS25HB0]  76.33,66.67 0 bottom

## Library data of the parts
ADR ADR1-ADR8 I2C I2C1-I2C8 = SparkFun-Jumpers
C1 C4 C6 C8 C10 C12 C14 C16 C18 = SparkFun-Capacitors; PROD_ID: CAP-08280
C2 C3 C5 C7 C9 C11 C13 C15 C17 = SparkFun-Capacitors; PROD_ID: CAP-00810
D1-D9 = SparkFun-LED; PROD_ID: DIO-00819
E$1 E$2 LOGO1-LOGO9 = SparkFun-Aesthetics
E$3 = SparkFun-Retired
J1 J6 J9 J10 J14 J15 J19 J20 J24 J25 J29 J30 J34 J35 J39 J40 J44 J45 = SparkFun-Connectors
J2 J4 J5 J8 J11 J13 J16 J18 J21 J23 J26 J28 J31 J33 J36 J38 J41 J43 = SparkFun-Connectors; PROD_ID: CONN-13694; VALUE: Qwiic Right Angle
J3 J7 J12 J17 J22 J27 J32 J37 J42 U$2 U$8 U$67 U$100 U$133 U$166 U$199 U$232 U$265 = SparkX
JP1-JP54 = SparkFun
R1 R2 R6 R10-R12 R16-R18 R22-R24 R28-R30 R34-R36 R40-R42 R46-R48 R52-R54 = SparkFun-Resistors; PROD_ID: RES-00824
R3 R9 R15 R21 R27 R33 R39 R45 R51 = SparkFun-Resistors; PROD_ID: RES-07856
R4 R5 R7 R8 R13 R14 R19 R20 R25 R26 R31 R32 R37 R38 R43 R44 R49 R50 = SparkFun-Resistors; PROD_ID: RES-08272
U1-U9 = LPS25HB
U$1 U$7 U$35 U$37 U$63-U$66 U$96-U$99 U$129-U$132 U$162-U$165 U$195-U$198 U$228-U$231 U$261-U$264 U$294-U$297 = buzzard_labels (2)
U$3-U$6 U$13 U$14 U$21 U$22 U$26 U$27 U$30-U$33 U$36 U$38-U$42 U$58-U$61 U$68-U$75 U$91-U$94 U$101-U$108 U$124-U$127 U$134-U$141 U$157-U$160 U$167-U$174 U$190-U$193 U$200-U$207 U$223-U$226 U$233-U$240 U$256-U$259 U$266-U$273 U$289-U$292 = Labels-0_04
U$9-U$12 U$15-U$20 U$23-U$25 U$28 U$29 U$34 U$43-U$57 U$62 U$76-U$90 U$95 U$109-U$123 U$128 U$142-U$156 U$161 U$175-U$189 U$194 U$208-U$222 U$227 U$241-U$255 U$260 U$274-U$288 U$293 = Labels

## Nets
3.3V: C1.1 C2.1 I2C.2 J2.2 J3.2 J4.2 J6.2 R1.2 R2.2 R3.2 R6.2 U2.1 U2.10
3.3V1: C3.1 C4.1 I2C1.2 J5.2 J7.2 J8.2 J10.2 R9.2 R10.2 R11.2 R12.2 U1.1 U1.10
3.3V2: C5.1 C6.1 I2C2.2 J11.2 J12.2 J13.2 J15.2 R15.2 R16.2 R17.2 R18.2 U3.1 U3.10
3.3V3: C7.1 C8.1 I2C3.2 J16.2 J17.2 J18.2 J20.2 R21.2 R22.2 R23.2 R24.2 U4.1 U4.10
3.3V4: C9.1 C10.1 I2C4.2 J21.2 J22.2 J23.2 J25.2 R27.2 R28.2 R29.2 R30.2 U5.1 U5.10
3.3V5: C11.1 C12.1 I2C5.2 J26.2 J27.2 J28.2 J30.2 R33.2 R34.2 R35.2 R36.2 U6.1 U6.10
3.3V6: C13.1 C14.1 I2C6.2 J31.2 J32.2 J33.2 J35.2 R39.2 R40.2 R41.2 R42.2 U7.1 U7.10
3.3V7: C15.1 C16.1 I2C7.2 J36.2 J37.2 J38.2 J40.2 R45.2 R46.2 R47.2 R48.2 U8.1 U8.10
3.3V8: C17.1 C18.1 I2C8.2 J41.2 J42.2 J43.2 J45.2 R51.2 R52.2 R53.2 R54.2 U9.1 U9.10
!INT: J1.1 J6.3 R1.1 U2.7
!INT1: J9.1 J10.3 R10.1 U1.7
!INT2: J14.1 J15.3 R16.1 U3.7
!INT3: J19.1 J20.3 R22.1 U4.7
!INT4: J24.1 J25.3 R28.1 U5.7
!INT5: J29.1 J30.3 R34.1 U6.7
!INT6: J34.1 J35.3 R40.1 U7.7
!INT7: J39.1 J40.3 R46.1 U8.7
!INT8: J44.1 J45.3 R52.1 U9.7
ADDR/MISO: ADR.2 J6.5 R2.1 U2.5
ADDR/MISO1: ADR1.2 J10.5 R11.1 U1.5
ADDR/MISO2: ADR2.2 J15.5 R17.1 U3.5
ADDR/MISO3: ADR3.2 J20.5 R23.1 U4.5
ADDR/MISO4: ADR4.2 J25.5 R29.1 U5.5
ADDR/MISO5: ADR5.2 J30.5 R35.1 U6.5
ADDR/MISO6: ADR6.2 J35.5 R41.1 U7.5
ADDR/MISO7: ADR7.2 J40.5 R47.1 U8.5
ADDR/MISO8: ADR8.2 J45.5 R53.1 U9.5
CS: J6.4 R6.1 U2.6
CS1: J10.4 R12.1 U1.6
CS2: J15.4 R18.1 U3.6
CS3: J20.4 R24.1 U4.6
CS4: J25.4 R30.1 U5.6
CS5: J30.4 R36.1 U6.6
CS6: J35.4 R42.1 U7.6
CS7: J40.4 R48.1 U8.6
CS8: J45.4 R54.1 U9.6
GND: ADR.1 C1.2 C2.2 D1.C J2.1 J3.1 J4.1 J6.1 U2.3 U2.8 U2.9
GND1: ADR1.1 C3.2 C4.2 D2.C J5.1 J7.1 J8.1 J10.1 U1.3 U1.8 U1.9
GND2: ADR2.1 C5.2 C6.2 D3.C J11.1 J12.1 J13.1 J15.1 U3.3 U3.8 U3.9
GND3: ADR3.1 C7.2 C8.2 D4.C J16.1 J17.1 J18.1 J20.1 U4.3 U4.8 U4.9
GND4: ADR4.1 C9.2 C10.2 D5.C J21.1 J22.1 J23.1 J25.1 U5.3 U5.8 U5.9
GND5: ADR5.1 C11.2 C12.2 D6.C J26.1 J27.1 J28.1 J30.1 U6.3 U6.8 U6.9
GND6: ADR6.1 C13.2 C14.2 D7.C J31.1 J32.1 J33.1 J35.1 U7.3 U7.8 U7.9
GND7: ADR7.1 C15.2 C16.2 D8.C J36.1 J37.1 J38.1 J40.1 U8.3 U8.8 U8.9
GND8: ADR8.1 C17.2 C18.2 D9.C J41.1 J42.1 J43.1 J45.1 U9.3 U9.8 U9.9
N$1: I2C.1 R5.2
N$2: I2C.3 R4.2
N$3: D1.A R3.1
N$4: I2C1.1 R8.2
N$5: I2C1.3 R7.2
N$6: D2.A R9.1
N$7: I2C2.1 R14.2
N$8: I2C2.3 R13.2
N$9: D3.A R15.1
N$10: I2C3.1 R20.2
N$11: I2C3.3 R19.2
N$12: D4.A R21.1
N$13: I2C4.1 R26.2
N$14: I2C4.3 R25.2
N$15: D5.A R27.1
N$16: I2C5.1 R32.2
N$17: I2C5.3 R31.2
N$18: D6.A R33.1
N$19: I2C6.1 R38.2
N$20: I2C6.3 R37.2
N$21: D7.A R39.1
N$22: I2C7.1 R44.2
N$23: I2C7.3 R43.2
N$24: D8.A R45.1
N$25: I2C8.1 R50.2
N$26: I2C8.3 R49.2
N$27: D9.A R51.1
SCL/SCK: J2.4 J3.4 J4.4 J6.7 R5.1 U2.2
SCL/SCK1: J5.4 J7.4 J8.4 J10.7 R8.1 U1.2
SCL/SCK2: J11.4 J12.4 J13.4 J15.7 R14.1 U3.2
SCL/SCK3: J16.4 J17.4 J18.4 J20.7 R20.1 U4.2
SCL/SCK4: J21.4 J22.4 J23.4 J25.7 R26.1 U5.2
SCL/SCK5: J26.4 J27.4 J28.4 J30.7 R32.1 U6.2
SCL/SCK6: J31.4 J32.4 J33.4 J35.7 R38.1 U7.2
SCL/SCK7: J36.4 J37.4 J38.4 J40.7 R44.1 U8.2
SCL/SCK8: J41.4 J42.4 J43.4 J45.7 R50.1 U9.2
SDA/MOSI: J2.3 J3.3 J4.3 J6.6 R4.1 U2.4
SDA/MOSI1: J5.3 J7.3 J8.3 J10.6 R7.1 U1.4
SDA/MOSI2: J11.3 J12.3 J13.3 J15.6 R13.1 U3.4
SDA/MOSI3: J16.3 J17.3 J18.3 J20.6 R19.1 U4.4
SDA/MOSI4: J21.3 J22.3 J23.3 J25.6 R25.1 U5.4
SDA/MOSI5: J26.3 J27.3 J28.3 J30.6 R31.1 U6.4
SDA/MOSI6: J31.3 J32.3 J33.3 J35.6 R37.1 U7.4
SDA/MOSI7: J36.3 J37.3 J38.3 J40.6 R43.1 U8.4
SDA/MOSI8: J41.3 J42.3 J43.3 J45.6 R49.1 U9.4